# Altium PCB ISA8_Ethernet.PcbDoc (part 2 of 2)
Units mm, origin at the board's own origin, x right, y up, seen from the top; angles counter-clockwise.
Board outline 104.14 x 74.93 mm, 2 copper layers (Front, Back); 34 components, 134 nets, 366 pads, 95 vias.
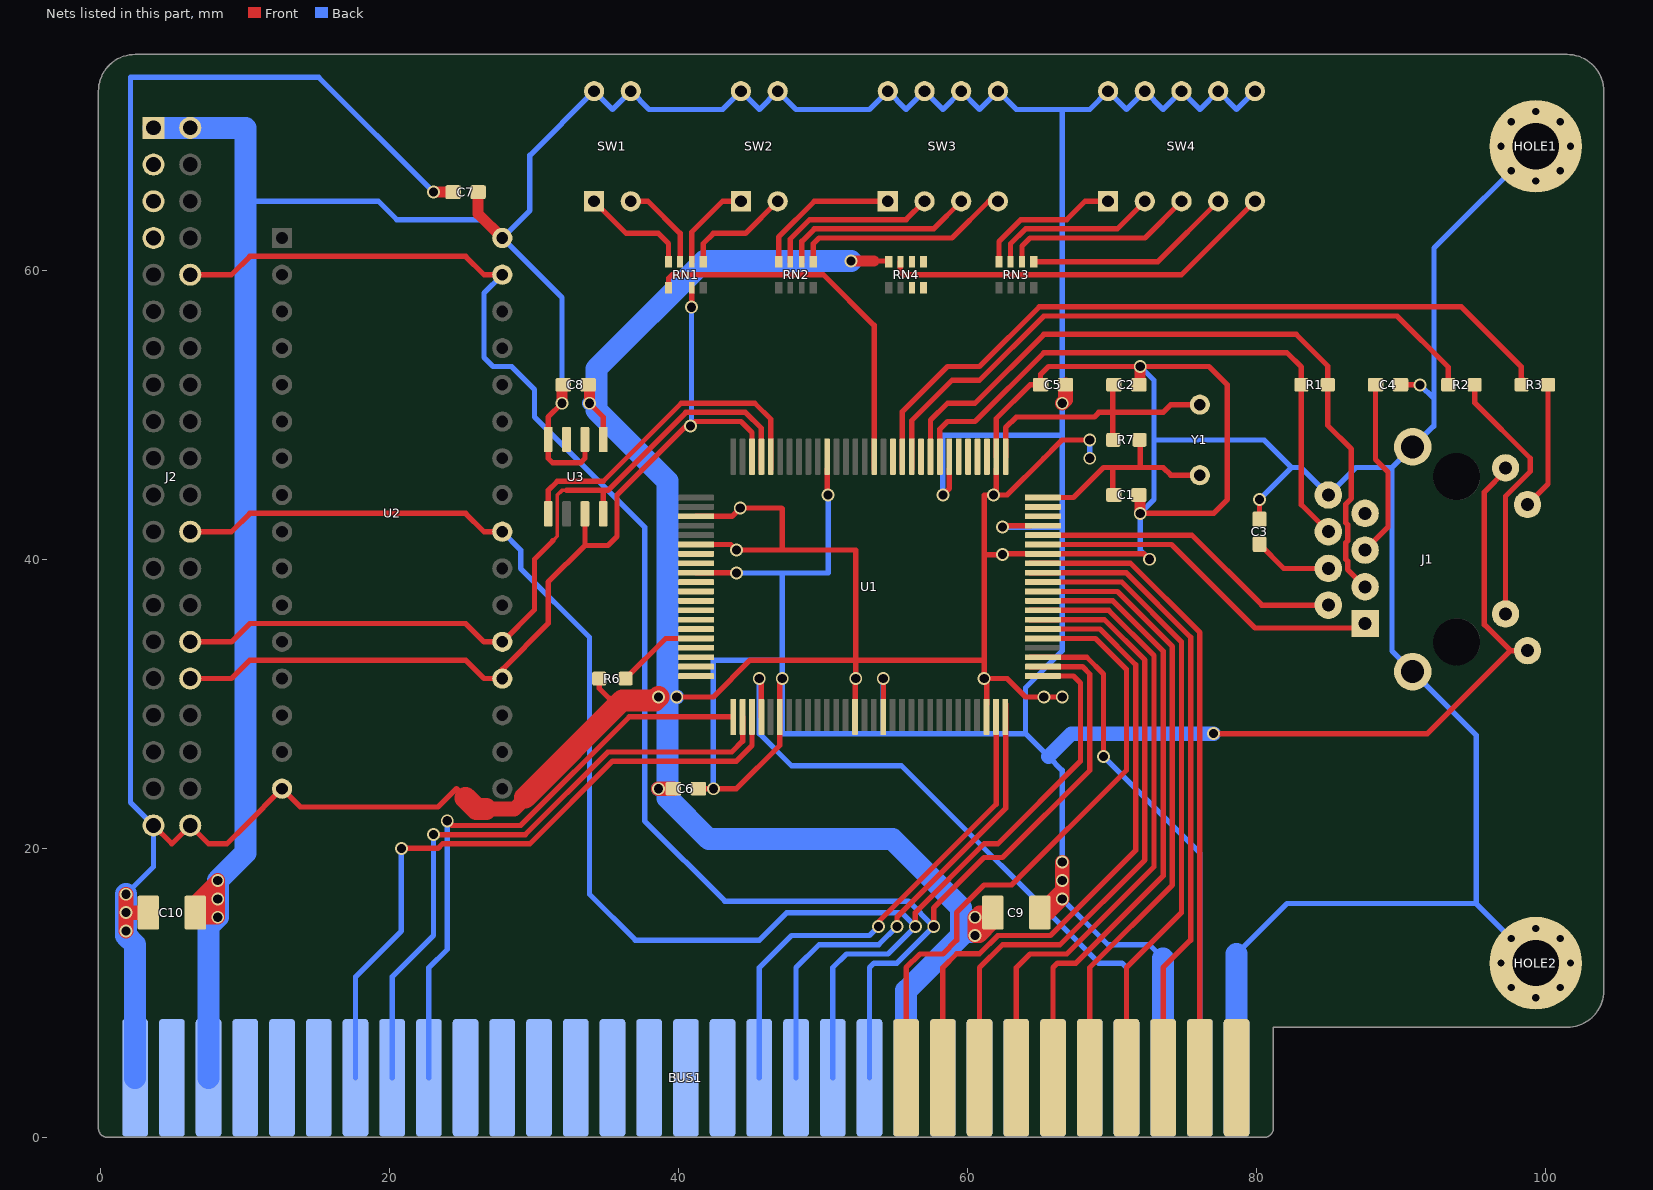
[diagram p2: the nets of this part, all layers, seen from the top]

## Via types
v1: diameter 0.889, hole 0.635, Front to Back, tented both sides, 95 vias

## Nets (pads, with @x,y where several pads share a name; then routed paths per layer and width w, separated by ;. In a path a pad name is that pad's centre, name@x,y a point inside that pad or via, vN(x,y) a via of type N, cw(c..) or ccw(c..) an arc to the next point about the centre after c; other vN are vias at no path point) (continued)
BD6: J2.32 RN1.3 U1.78 U2.20 U3.3 | length 65.7
  Front w0.368: J2.32@6.223,31.75 9.08,31.75 10.351,33.02 25.273,33.02 26.543,31.75 U2.20@27.813,31.75 27.813,32.385 30.988,35.56 30.988,38.417 33.528,40.957 ; U3.3@33.528,43.145 33.528,40.957 ; v1(40.9,57.445) 40.913,57.457 RN1.3@40.913,58.79 ; U1.78@45.088,46.225 45.088,48.765 44.323,49.53 41.148,49.53 v1(40.831,49.212) 40.519,49.212 35.75,44.444 35.75,41.593 35.115,40.957 33.528,40.957
  Back w0.368: v1(40.831,49.212) 40.9,49.282 v1(40.9,57.445)
BD7: J2.30 U1.77 U2.21 U3.4 | length 55.8
  Front w0.254: 31.313,41.283 31.623,41.593 31.623,44.45 31.941,44.767 32.258,44.767
  Front w0.368: J2.30@6.223,34.29 9.08,34.29 10.351,35.56 25.273,35.56 26.543,34.29 U2.21@27.813,34.29 30.035,36.512 30.035,40.005 31.313,41.283 ; 32.258,44.767 34.798,44.767 ; U3.4@34.798,43.145 34.798,44.767 ; U1.77@45.738,46.225 45.738,49.067 44.64,50.165 40.513,50.165 35.115,44.767 34.798,44.767
D0: BUS1.40 U1.36 | length 45.5
  Front w0.368: BUS1.40@58.293,4.127 58.293,11.747 59.254,12.708 60.833,12.708 62.095,13.97 65.732,13.97 71.628,19.866 71.628,32.703 69.156,35.175 U1.36@64.338,35.175
D1: BUS1.39 U1.37 | length 45
  Front w0.368: BUS1.39@60.833,4.127 60.833,11.747 62.42,13.335 66.389,13.335 72.263,19.209 72.263,33.02 69.458,35.825 U1.37@64.338,35.825
D2: BUS1.38 U1.38 | length 44.5
  Front w0.368: BUS1.38@63.373,4.127 63.373,11.747 64.325,12.7 66.865,12.7 72.898,18.732 72.898,33.337 69.761,36.475 U1.38@64.338,36.475
D3: BUS1.37 U1.39 | length 44.1
  Front w0.368: U1.39@64.338,37.125 70.063,37.125 73.533,33.655 73.533,18.098 67.501,12.065 66.23,12.065 65.913,11.747 BUS1.37@65.913,4.127
D4: BUS1.36 U1.40 | length 43.6
  Front w0.368: U1.40@64.338,37.775 70.366,37.775 74.168,33.972 74.168,17.462 68.453,11.747 BUS1.36@68.453,4.127
D5: BUS1.35 U1.41 | length 43.9
  Front w0.368: U1.41@64.338,38.425 70.668,38.425 74.803,34.29 74.803,15.557 70.993,11.747 BUS1.35@70.993,4.127
D6: BUS1.34 U1.42 | length 44.2
  Front w0.368: U1.42@64.338,39.075 70.971,39.075 75.438,34.608 75.438,13.652 73.533,11.747 BUS1.34@73.533,4.127
D7: BUS1.33 U1.43 | length 44.5
  Front w0.368: U1.43@64.338,39.725 71.273,39.725 76.073,34.925 BUS1.33@76.073,4.127
EECS: U1.76 U3.1 | length 23.4
  Front w0.368: U3.1@30.988,43.145 30.988,44.767 31.623,45.402 34.798,45.402 40.195,50.8 45.276,50.8 46.388,49.688 U1.76@46.388,46.225
GND: BUS1.1 BUS1.10 BUS1.31 C1.1 C2.1 C3.2 C4.2 C5.2 C6.2 C7.2 C8.2 C9.2 C10.2 HOLE1.1 HOLE2.1 J1.13 J1.R8 J2.39 J2.40 R6.1 RN4.8 U1.14 U1.28 U1.44 U1.52 U1.83 U1.86 U2.16 U3.5 | length 538.4
  Front w0.368: J2.39@3.683,21.59 4.953,20.32 J2.40@6.223,21.59 7.493,20.32 8.763,20.32 10.033,21.59 U2.16@12.573,24.13 13.843,22.86 23.368,22.86 24.638,24.13 25.908,22.86 ; v1(33.846,50.8) 34.798,49.847 U3.5@34.798,48.295 ; R6.1@34.52,31.75 34.52,31.075 35.75,29.845 ; v1(39.878,30.48) 42.418,30.48 44.958,33.02 52.261,33.02 ; U1.86@41.213,41.025 43.62,41.025 v1(44.005,40.64) 47.18,40.64 ; U1.83@41.213,42.975 43.702,42.975 v1(44.274,43.547) 47.131,43.547 47.18,43.497 47.18,40.64 ; U1.14@52.238,29.975 52.238,31.728 v1(52.261,31.75) 52.261,33.02 ; 53.53,60.642 54.501,60.642 RN4.8@54.553,60.59 ; U1.28@61.338,29.975 61.338,31.562 v1(61.151,31.75) ; U1.52@61.988,46.225 61.988,44.652 v1(61.785,44.45) ; U1.52@61.988,47.1 61.988,49.732 64.325,52.07 C5.2@65.05,52.07 65.05,52.795 65.596,53.34 v1(71.945,53.34) 76.708,53.34 77.978,52.07 77.978,44.133 77.026,43.18 v1(71.945,43.18) v1@71.856,43.18 ; U1.44@64.338,40.375 62.473,40.375 v1(62.42,40.322) 61.151,40.322 ; U1.44@65.213,40.375 72.211,40.375 v1(72.581,40.005) ; v1(66.548,30.48) v1(65.278,30.48) 64.008,30.48 62.738,31.75 v1(61.151,31.75) ; v1(68.453,48.26) 66.548,48.26 66.23,47.942 65.278,46.99 62.738,44.45 v1(61.785,44.45) ; C3.2@80.2,42.773 v1(80.2,44.133) ; C4.2@89.953,52.07 v1(91.313,52.07) ; 47.18,40.64 52.261,40.64 52.261,33.02 ; 52.261,33.02 61.151,33.02 ; v1(61.151,31.75) 61.151,33.02 ; 61.151,33.02 61.151,40.322 ; 61.151,40.322 61.151,44.45 v1(61.785,44.45)
  Front w0.762: v1(23.05,65.405) C7.2@24.41,65.405 ; 25.908,22.86 27.189,22.86 27.199,22.85 28.756,22.85 29.4,23.495 ; C8.2@33.756,52.07 33.846,51.98 v1(33.846,50.8) ; v1(51.943,60.642) 53.53,60.642 ; C1.1@71.856,44.45 71.945,44.36 v1(71.945,43.18) ; C2.1@71.856,52.07 71.945,52.16 v1(71.945,53.34)
  Front w1.016: v1(1.778,14.287) v1(1.778,15.557) ; v1(1.778,16.827) v1(1.778,15.557) ; C10.2@3.328,15.557 v1(1.778,15.557) ; 25.273,23.495 26.045,22.723 28.629,22.723 29.4,23.495 35.75,29.845 36.386,30.48 v1(38.608,30.48) ; v1(38.608,24.13) C6.2@39.65,24.13 ; v1(60.515,13.97) 60.833,13.97 61.748,14.885 C9.2@61.748,15.557 60.833,15.557 v1(60.515,15.24) v1(60.515,13.97)
  Front w1.524: 25.273,23.495 26.032,22.736 26.68,22.736 ; 29.384,23.512 36.118,30.246 38.374,30.246 v1(38.608,30.48)
  Back w0.368: v1(1.778,16.827) 3.683,18.732 J2.39@3.683,21.59 2.095,23.177 2.095,73.343 15.113,73.343 v1(23.05,65.405) ; v1(68.453,46.99) v1(68.453,48.26) ; v1(71.945,53.34) 72.898,52.388 72.898,48.26 ; v1(72.581,40.005) 71.945,40.64 v1(71.945,43.18) 72.898,44.133 72.898,48.26 ; 78.613,12.7 82.105,16.192 95.186,16.192 ; v1(80.2,44.133) 82.423,46.355 ; v1(91.313,52.07) 92.266,51.117 ; HOLE2.1@99.314,12.065 95.186,16.192 ; HOLE1.1@99.314,68.58 92.266,61.531 92.266,51.117 ; 72.898,48.26 80.518,48.26 82.423,46.355 ; 82.423,46.355 83.058,46.355 J1.R8@84.963,44.45 86.868,46.355 89.368,46.355 ; 89.368,46.355 89.368,33.655 J1.13@90.793,32.23 95.186,27.837 95.186,16.192 ; 89.368,46.355 J1.13@90.793,47.78 92.226,49.212 92.266,49.212 92.266,51.117
  Back w0.762: v1(33.846,50.8) 34.322,50.324
  Back w1.016: v1(33.846,50.8) 34.163,50.8 34.322,50.959 ; v1(38.608,24.13) 38.925,24.13 39.243,24.447 ; v1(38.608,30.48) 39.243,30.48 v1(39.878,30.48) ; 59.563,13.97 v1(60.515,13.97) ; 59.563,15.875 60.198,15.24 v1(60.515,15.24)
  Back w1.524: v1(1.778,16.827) v1(1.778,15.557) v1(1.778,14.287) 1.778,13.97 2.413,13.335 BUS1.31@2.413,4.127 ; v1(51.943,60.642) 41.783,60.642 34.322,53.181 34.322,50.959 34.322,50.324 39.243,45.402 39.243,30.48 39.243,24.447 39.243,23.495 42.1,20.637 54.8,20.637 59.563,15.875 59.563,13.97 55.753,10.16 BUS1.10@55.753,4.127 ; BUS1.1@78.613,4.127 78.613,12.7
I\O\C\S\1\6\: R6.2 U1.96 | length 6
  Front w0.368: R6.2@36.346,31.75 39.121,34.525 U1.96@41.213,34.525
I\O\R\: BUS1.14 U1.29 | length 35.8
  Front w0.368: v1(53.848,14.605) 53.848,14.922 61.988,23.062 U1.29@61.988,29.975
  Back w0.368: BUS1.14@45.593,4.127 45.593,11.747 47.816,13.97 53.213,13.97 v1(53.848,14.605)
I\O\W\: BUS1.13 U1.30 | length 34.3
  Front w0.368: v1(55.118,14.605) 55.118,15.24 62.638,22.76 U1.30@62.638,29.975
  Back w0.368: BUS1.13@48.133,4.127 48.133,11.747 49.721,13.335 53.848,13.335 v1(55.118,14.605)
IOCHRDY: BUS1.41 U1.35 | length 44.2
  Front w0.368: BUS1.41@55.753,4.127 55.753,11.747 56.706,12.7 58.293,12.7 59.245,13.652 59.245,15.557 61.151,17.462 63.049,17.462 70.993,25.407 70.993,32.385 68.853,34.525 U1.35@64.338,34.525
IRQ3: BUS1.25 U1.3 | length 46.4
  Front w0.368: v1(20.828,20.002) 23.368,20.002 23.685,20.32 29.718,20.32 35.433,26.035 44.005,26.035 45.088,27.117 U1.3@45.088,29.1
  Back w0.368: BUS1.25@17.653,4.127 17.653,11.112 20.828,14.287 v1(20.828,20.002)
IRQ4: BUS1.24 U1.2 | length 43.8
  Front w0.368: v1(23.05,20.955) 29.4,20.955 35.115,26.67 43.688,26.67 44.438,27.42 U1.2@44.438,29.1
  Back w0.368: BUS1.24@20.193,4.127 20.193,11.112 23.05,13.97 v1(23.05,20.955)
IRQ5: BUS1.23 U1.1 | length 41.3
  Front w0.368: v1(24.003,21.907) 24.321,21.59 29.083,21.59 36.593,29.1 U1.1@43.788,29.1
  Back w0.368: BUS1.23@22.733,4.127 22.733,11.747 24.003,13.018 v1(24.003,21.907)
IRQ9: BUS1.4 U1.4 | length 46.2
  Front w0.368: v1(45.593,31.75) 45.738,31.605 U1.4@45.738,29.1
  Back w0.368: v1(45.593,31.75) 45.593,27.94 47.816,25.717 55.435,25.717 69.088,12.065 70.675,12.065 70.993,11.747 BUS1.4@70.993,4.127
JP: RN1.1 U1.65 | length 26.4
  Front w0.368: RN1.1@39.313,58.79 39.313,59.442 39.56,59.69 50.038,59.69 53.538,56.19 53.538,55.237 U1.65@53.538,46.225
LED_CRS: R3.2 U1.62 | length 52.8
  Front w0.368: U1.62@55.488,46.225 55.488,50.217 58.61,53.34 60.833,53.34 64.96,57.468 94.17,57.468 98.298,53.34 98.298,52.585 98.338,52.545 R3.2@98.338,52.07
LED_LINK: R2.2 U1.61 | length 46.2
  Front w0.368: U1.61@56.138,46.225 56.138,49.598 58.928,52.387 60.833,52.387 65.278,56.832 89.725,56.832 93.258,53.3 R2.2@93.258,52.07
Net-(BUS1-Pad5): BUS1.5
Net-(BUS1-Pad6): BUS1.6
Net-(BUS1-Pad7): BUS1.7
Net-(BUS1-Pad8): BUS1.8
Net-(BUS1-Pad9): BUS1.9
Net-(BUS1-Pad15): BUS1.15
Net-(BUS1-Pad16): BUS1.16
Net-(BUS1-Pad17): BUS1.17
Net-(BUS1-Pad18): BUS1.18
Net-(BUS1-Pad19): BUS1.19
Net-(BUS1-Pad20): BUS1.20
Net-(BUS1-Pad21): BUS1.21
Net-(BUS1-Pad22): BUS1.22
Net-(BUS1-Pad26): BUS1.26
Net-(BUS1-Pad27): BUS1.27
Net-(BUS1-Pad28): BUS1.28
Net-(BUS1-Pad30): BUS1.30
Net-(BUS1-Pad32): BUS1.32
Net-(C1-Pad2): C1.2 R7.1 U1.50 Y1.1 | length 15.8
  Front w0.368: U1.50@65.213,44.275 67.325,44.275 69.406,46.355 70.04,46.355 ; C1.2@70.13,44.45 70.04,44.54 70.04,46.355 ; R7.1@71.906,48.26 71.945,48.22 71.945,46.355 ; Y1.1@76.073,45.819 74.069,45.819 73.533,46.355 71.945,46.355 ; 70.04,46.355 71.945,46.355
Net-(C2-Pad2): C2.2 R7.2 U1.51 Y1.2 | length 20
  Front w0.368: U1.51@62.638,47.1 62.638,49.113 63.373,49.847 68.77,49.847 69.088,50.165 70.04,50.165 ; R7.2@70.08,48.26 70.04,48.3 70.04,50.165 ; C2.2@70.13,52.07 70.04,51.98 70.04,50.165 ; R7.2@70.358,48.3 R7.2@70.398,48.26 ; Y1.2@76.073,50.701 74.069,50.701 73.533,50.165 70.04,50.165
Net-(C3-Pad1): C3.1 J1.R4 | length 5.5
  Front w0.368: C3.1@80.2,41.047 81.878,39.37 J1.R4@84.963,39.37
Net-(C4-Pad1): C4.1 J1.R5 | length 12.4
  Front w0.368: J1.R5@87.503,40.64 89.09,42.227 89.09,46.038 88.228,46.9 C4.1@88.228,52.07
Net-(J1-PadL2): J1.L2 R3.1 | length 8.9
  Front w0.368: J1.L2@98.743,43.79 100.163,45.21 R3.1@100.163,52.07
Net-(J1-PadL3): J1.L3 R2.1 | length 18.2
  Front w0.368: R2.1@95.083,52.07 95.083,50.84 98.933,46.99 98.933,46.073 97.223,44.363 J1.L3@97.223,36.22
Net-(J1-PadR7): J1.R7
Net-(J2-Pad3): J2.3
Net-(J2-Pad5): J2.5
Net-(J2-Pad7): J2.7
Net-(RN1-Pad5): RN1.5 SW2.2 | length 7.6
  Front w0.368: RN1.5@41.713,60.59 41.713,61.843 42.418,62.547 44.64,62.547 SW2.2@46.863,64.77
Net-(RN1-Pad6): RN1.6 SW2.1 | length 6.3
  Front w0.368: RN1.6@40.913,60.59 40.913,62.63 43.053,64.77 SW2.1@44.323,64.77
Net-(RN1-Pad7): RN1.7 SW1.2 | length 6.3
  Front w0.368: SW1.2@36.703,64.77 37.891,64.77 40.113,62.547 RN1.7@40.113,60.59
Net-(RN1-Pad8): RN1.8 SW1.1 | length 7.6
  Front w0.368: SW1.1@34.163,64.77 36.386,62.547 38.608,62.547 39.313,61.843 RN1.8@39.313,60.59
Net-(RN2-Pad5): RN2.5 SW3.4 | length 15.2
  Front w0.368: RN2.5@49.333,60.59 49.333,61.843 49.721,62.23 58.928,62.23 61.468,64.77 SW3.4@62.103,64.77
Net-(RN2-Pad6): RN2.6 SW3.3 | length 13.6
  Front w0.368: RN2.6@48.533,60.59 48.533,61.995 49.403,62.865 57.658,62.865 SW3.3@59.563,64.77
Net-(RN2-Pad7): RN2.7 SW3.2 | length 11.9
  Front w0.368: RN2.7@47.733,60.59 47.733,62.148 49.085,63.5 55.753,63.5 SW3.2@57.023,64.77
Net-(RN2-Pad8): RN2.8 SW3.1 | length 10.3
  Front w0.368: RN2.8@46.933,60.59 46.933,62.3 49.403,64.77 SW3.1@54.483,64.77
Net-(RN3-Pad5): RN3.5 SW4.4 | length 14.5
  Front w0.368: RN3.5@64.573,60.59 73.163,60.59 SW4.4@77.343,64.77
Net-(RN3-Pad6): RN3.6 SW4.3 | length 13.4
  Front w0.368: RN3.6@63.773,60.59 63.773,61.677 64.325,62.23 64.643,62.23 72.263,62.23 SW4.3@74.803,64.77
Net-(RN3-Pad7): RN3.7 SW4.2 | length 11.7
  Front w0.368: RN3.7@62.973,60.59 62.973,61.83 64.008,62.865 70.358,62.865 SW4.2@72.263,64.77
Net-(RN3-Pad8): RN3.8 SW4.1 | length 10.1
  Front w0.368: RN3.8@62.173,60.59 62.173,61.982 63.691,63.5 66.865,63.5 68.135,64.77 SW4.1@69.723,64.77
Net-(RN4-Pad3): RN4.3
Net-(RN4-Pad4): RN4.4
Net-(RN4-Pad5): RN4.5
Net-(RN4-Pad6): RN4.6
Net-(RN4-Pad7): RN4.7 SW4.5 | length 27.4
  Front w0.368: RN4.7@55.353,60.59 55.353,59.899 55.562,59.69 74.803,59.69 SW4.5@79.883,64.77
Net-(U1-Pad48): U1.48
Net-(U1-Pad49): U1.49
Net-(U1-Pad53): U1.53
Net-(U1-Pad54): U1.54
Net-(U1-Pad55): U1.55
Net-(U1-Pad56): U1.56
Net-(U1-Pad60): U1.60
Net-(U1-Pad63): U1.63
Net-(U1-Pad87): U1.87
Net-(U1-Pad88): U1.88
Net-(U1-Pad90): U1.90
Net-(U1-Pad91): U1.91
Net-(U1-Pad92): U1.92
Net-(U1-Pad93): U1.93
Net-(U1-Pad94): U1.94
Net-(U1-Pad95): U1.95
Net-(U1-Pad97): U1.97
Net-(U1-Pad98): U1.98
Net-(U1-Pad99): U1.99
Net-(U1-Pad100): U1.100
Net-(U3-Pad7): U3.7
RSTDRV: BUS1.2 U1.33 | length 36.2
  Front w0.368: U1.33@64.338,33.225 68.248,33.225 69.406,32.067 v1(69.406,26.352)
  Back w0.368: v1(69.406,26.352) 76.073,19.685 BUS1.2@76.073,4.127
S\M\E\M\R\: BUS1.12 J2.24 U1.31 U2.24 | length 114.7
  Front w0.368: J2.24@6.223,41.91 9.08,41.91 10.351,43.18 25.273,43.18 26.543,41.91 U2.24@27.813,41.91 ; v1(56.388,14.605) 56.388,15.557 61.151,20.32 62.103,20.32 67.818,26.035 67.818,31.432 67.325,31.925 U1.31@65.213,31.925
  Back w0.368: U2.24@27.813,41.91 29.083,40.64 29.083,39.37 33.846,34.608 33.846,16.828 37.02,13.652 45.593,13.652 47.498,15.557 55.435,15.557 v1(56.388,14.605) 54.483,12.7 51.625,12.7 50.673,11.747 BUS1.12@50.673,4.127
S\M\E\M\W\: BUS1.11 J2.10 U1.32 U2.31 | length 129.6
  Front w0.368: J2.10@6.223,59.69 9.08,59.69 10.351,60.96 25.273,60.96 26.543,59.69 U2.31@27.813,59.69 ; v1(57.658,14.605) 57.658,15.875 61.151,19.367 62.42,19.367 68.453,25.4 68.453,32.067 67.946,32.575 U1.32@64.338,32.575
  Back w0.368: U2.31@27.813,59.69 26.543,58.42 26.543,53.975 27.178,53.34 28.455,53.34 28.455,53.333 30.035,51.752 30.035,49.847 37.659,42.224 37.659,21.904 43.212,16.351 55.912,16.351 v1(57.658,14.605) 55.118,12.065 53.53,12.065 53.213,11.747 BUS1.11@53.213,4.127
TP_RX+: J1.R3 R1.1 U1.59 | length 51
  Front w0.368: U1.59@57.438,46.225 57.438,49.628 58.61,50.8 60.515,50.8 65.278,55.562 82.74,55.562 84.923,53.38 R1.1@84.923,52.07 84.923,49.252 86.55,47.625 86.55,44.202 86.169,43.82 86.169,42.54 86.297,42.411 86.297,41.27 86.169,41.141 86.169,40 86.297,39.871 86.297,39.306 J1.R3@87.503,38.1
TP_RX-: J1.R6 R1.2 U1.58 | length 42.6
  Front w0.368: U1.58@58.088,46.225 58.088,49.007 58.61,49.53 60.515,49.53 65.278,54.292 82.105,54.292 83.098,53.3 R1.2@83.098,52.07 83.098,43.775 J1.R6@84.963,41.91
TP_TX+: J1.R1 U1.45 | length 24.8
  Front w0.368: U1.45@65.213,41.025 74.1,41.025 79.883,35.242 87.185,35.242 J1.R1@87.503,35.56
TP_TX-: J1.R2 U1.46 | length 21.8
  Front w0.368: U1.46@65.213,41.675 75.514,41.675 80.359,36.83 J1.R2@84.963,36.83
VCC: BUS1.3 BUS1.29 C5.1 C6.1 C7.1 C8.1 C9.1 C10.1 J1.L1 J1.L4 J2.1 J2.2 SW1.3 SW1.4 SW2.3 SW2.4 SW3.5 SW3.6 SW3.7 SW3.8 SW4.6 SW4.7 SW4.8 SW4.9 SW4.10 U1.6 U1.17 U1.47 U1.57 U1.70 U1.89 U2.32 U3.6 U3.8 | length 426
  Front w0.368: v1(31.941,50.8) 30.988,49.847 U3.8@30.988,48.295 30.988,46.99 31.305,46.672 33.21,46.672 33.528,46.99 U3.6@33.528,48.295 ; U1.89@41.213,39.075 43.983,39.075 v1(44.005,39.052) ; C6.1@41.376,24.13 v1(42.418,24.13) 44.005,24.13 47.013,27.137 U1.6@47.013,29.1 47.013,31.582 v1(47.18,31.75) ; U1.70@50.288,46.225 50.288,44.518 v1(50.355,44.45) ; v1(54.165,31.75) 54.188,31.728 U1.17@54.188,29.975 ; v1(58.293,44.45) 58.738,44.895 U1.57@58.738,46.225 ; v1(62.42,42.227) 62.518,42.325 U1.47@64.338,42.325 ; v1(77.025,27.94) 91.818,27.94 97.558,33.68 ; J1.L1@97.223,46.33 97.223,46.126 95.758,44.661 95.758,35.48 97.558,33.68 ; J1.L4@98.743,33.68 97.558,33.68
  Front w0.762: C7.1@26.136,65.405 26.136,63.907 U2.32@27.813,62.23 ; v1(31.941,50.8) 31.941,51.98 C8.1@32.03,52.07
  Front w1.016: v1(66.548,19.05) v1(66.548,17.78) 66.548,17.145 ; v1(66.548,50.8) 66.776,51.028 C5.1@66.776,52.07 ; C10.1@6.578,15.557 6.578,16.23 v1(8.128,17.78) v1(8.128,16.51) ; C10.1@6.578,15.557 7.175,15.557 v1(8.128,16.51) ; C10.1@6.578,15.557 6.896,15.24 v1(8.128,15.24) v1(8.128,16.51) ; 66.548,17.145 v1(66.548,16.51) 65.596,15.557 C9.1@64.998,15.557 66.548,17.107 66.548,17.145
  Back w0.368: 10.033,64.77 19.241,64.77 20.511,63.5 26.543,63.5 U2.32@27.813,62.23 ; v1(31.941,50.8) 31.941,58.102 U2.32@27.813,62.23 ; v1(42.418,24.13) 42.418,33.02 47.18,33.02 ; v1(44.005,39.052) 47.18,39.052 ; v1(50.355,44.45) 50.355,39.052 47.18,39.052 ; v1(54.165,31.75) 54.165,27.94 ; v1(58.293,44.45) 58.293,48.578 66.548,48.578 v1(66.548,50.8) ; v1(62.42,42.227) 66.548,42.227 ; v1(66.548,16.51) 69.723,13.335 72.581,13.335 73.533,12.383 ; v1(66.548,19.05) 66.548,25.4 65.596,26.352 64.008,27.94 ; SW4.6@79.883,72.39 78.613,71.12 SW4.7@77.343,72.39 76.073,71.12 SW4.8@74.803,72.39 73.533,71.12 SW4.9@72.263,72.39 70.993,71.12 SW4.10@69.723,72.39 68.453,71.12 66.548,71.12 ; U2.32@27.813,62.23 29.718,64.135 29.718,67.945 SW1.4@34.163,72.39 35.433,71.12 SW1.3@36.703,72.39 37.973,71.12 43.053,71.12 SW2.4@44.323,72.39 45.593,71.12 SW2.3@46.863,72.39 48.133,71.12 53.213,71.12 SW3.8@54.483,72.39 55.753,71.12 SW3.7@57.023,72.39 58.293,71.12 SW3.6@59.563,72.39 60.833,71.12 SW3.5@62.103,72.39 63.373,71.12 66.548,71.12 ; 47.18,33.02 47.18,39.052 ; 47.18,33.02 v1(47.18,31.75) 47.18,27.94 54.165,27.94 ; 54.165,27.94 64.008,27.94 ; 64.008,27.94 64.008,31.115 66.548,33.655 66.548,42.227 ; 66.548,42.227 v1(66.548,50.8) ; v1(66.548,50.8) 66.548,71.12
  Back w1.016: U2.32@27.813,62.23 U2.32@27.931,62.23 ; 65.596,26.352 67.183,27.94 v1(77.025,27.94)
  Back w1.524: J2.1@3.683,69.85 J2.2@6.223,69.85 10.033,69.85 10.033,64.77 10.033,19.685 8.572,18.224 v1(8.128,17.78) v1(8.128,16.51) v1(8.128,15.24) 7.493,14.605 BUS1.29@7.493,4.127 ; BUS1.3@73.533,4.127 73.533,12.383
pads on no net: J1.Un1 J1.Un2

## Polygon pours and split planes (outlines as drawn)
VCC on Back "Back-VCC" (solid, remove dead copper, pour order 3): 80.518,72.707 80.518,56.197 80.2,55.88 67.501,55.88 67.183,55.562 67.183,33.972 64.325,31.115 64.325,29.845 75.438,18.732 75.438,12.065 74.168,10.795 72.898,10.795 70.993,12.7 69.406,12.7 55.753,26.352 48.133,26.352 46.228,28.258 45.276,28.258 45.276,25.4 43.053,23.177 41.783,23.177 40.831,24.13 40.831,39.37 41.148,39.688 45.276,39.688 47.498,41.91 47.498,48.578 49.721,50.8 56.07,50.8 57.975,52.705 57.975,62.23 57.658,62.547 41.465,62.547 32.893,53.975 32.893,50.165 32.575,49.847 31.305,49.847 30.988,50.165 30.988,58.737 29.083,60.642 16.7,60.642 14.16,63.182 10.986,63.182 10.668,62.865 9.398,62.865 9.398,70.485 16.066,70.485 22.415,64.135 24.956,64.135 33.846,73.025 80.2,73.025
GND on Back "Back-GND-1" (solid, remove dead copper, pour order 2): 57.34,61.595 57.34,58.737 57.023,58.42 40.513,58.42 39.878,57.785 39.878,46.99 41.783,45.085 42.735,45.085 44.323,43.497 44.323,42.227 45.276,41.275 45.276,40.64 44.958,40.322 40.513,40.322 40.195,40.005 40.195,23.812 41.465,22.543 43.37,22.543 45.91,25.082 55.118,25.082 67.501,12.7 67.501,12.383 67.183,12.065 56.706,12.065 58.928,14.287 58.928,14.922 56.706,17.145 43.37,17.145 38.291,22.225 38.291,42.545 33.528,47.307 33.528,53.34 42.1,61.912 57.023,61.912
GND on Back "Back-GND" (solid, remove dead copper, pour order 0): 104.013,48.895 91.948,48.895 89.408,46.355 89.408,33.655 91.948,31.115 104.013,31.115 104.013,7.62 81.153,7.62 81.153,11.747 80.835,12.065 80.518,12.065 79.248,10.795 77.978,10.795 76.708,12.065 76.708,20.002 70.675,26.035 70.675,26.67 70.993,26.987 77.66,26.987 77.978,27.305 77.978,28.575 77.66,28.892 66.23,28.892 64.96,30.162 64.96,30.797 65.596,31.432 67.818,33.337 67.818,54.927 68.135,55.245 80.835,55.245 81.153,55.562 81.153,73.343 80.835,73.66 33.528,73.66 24.638,64.77 22.733,64.77 16.383,71.12 2.73,71.12 2.413,70.802 2.413,68.897 2.73,68.58 8.445,68.58 8.763,68.263 8.763,22.225 6.223,19.685 6.223,12.7 4.318,10.795 1.778,10.795 -0.127,12.7 -0.127,74.93 104.013,74.93
GND on Front "Front-GND-1" (solid, remove dead copper, pour order 4): 26.226,23.812 26.86,23.812 27.495,23.177 28.13,23.177 28.765,23.812 30.67,23.812 28.765,21.907 25.273,21.907 24.638,22.543 22.098,22.543 19.241,19.685 13.525,19.685 12.573,18.732 5.271,18.732 3.683,17.145 3.683,13.335 3.365,13.018 0.826,13.018 -0.127,13.97 -0.127,21.907 0.826,22.86 8.763,22.86 10.668,24.765 25.273,24.765
GND on Front "Front-GND" (solid, remove dead copper, pour order 1): 82.423,52.705 82.423,34.608 83.058,33.972 89.725,33.972 92.583,31.115 92.583,29.845 92.266,29.527 64.008,29.527 62.738,30.797 43.688,30.797 42.418,29.527 36.068,29.527 33.528,26.987 33.528,31.75 34.163,32.385 35.115,32.385 35.433,32.067 35.433,31.115 35.75,30.797 37.973,30.797 38.608,31.432 42.735,31.432 43.053,31.75 43.053,41.275 46.863,41.275 46.863,43.18 43.688,43.18 43.688,43.815 45.276,45.402 63.055,45.402 63.373,45.72 63.373,48.578 63.055,48.895 61.468,48.895 60.833,49.53 65.278,53.975 81.153,53.975

## Keep-outs
Edge.Cuts:
  lines w0.381: -0.127,0.635 ccw(c0.508,0.635) 0.508,0 ; -0.127,0.635 ccw(c0.508,0.635) 0.508,0 ; -0.127,0.635 -0.127,72.39 ; -0.127,0.635 -0.127,72.39 ; -0.127,72.39 cw(c2.413,72.39) 2.413,74.93 ; -0.127,72.39 cw(c2.413,72.39) 2.413,74.93 ; 0.508,0 80.518,0 ; 0.508,0 80.518,0 ; 2.413,74.93 101.473,74.93 ; 2.413,74.93 101.473,74.93 ; 80.518,0 ccw(c80.518,0.635) 81.153,0.635 ; 80.518,0 ccw(c80.518,0.635) 81.153,0.635 ; 81.153,0.635 81.153,7.62 ; 81.153,0.635 81.153,7.62 ; 81.153,7.62 101.473,7.62 ; 81.153,7.62 101.473,7.62 ; 101.473,7.62 ccw(c101.473,10.16) 104.013,10.16 ; 101.473,7.62 ccw(c101.473,10.16) 104.013,10.16 ; 101.473,74.93 cw(c101.473,72.39) 104.013,72.39 ; 101.473,74.93 cw(c101.473,72.39) 104.013,72.39 ; 104.013,10.16 104.013,72.39 ; 104.013,10.16 104.013,72.39

## Silkscreen, mask and mechanical layers (free items; w line width, h text height)
F.SilkS:
  lines w0.12: 0.826,68.897 1.778,69.85 0.826,70.802 0.826,68.897 ; 75.436,15.724 75.455,15.836 75.529,16.003 75.584,16.115 75.584,16.338 75.603,16.357 75.751,16.412 75.714,16.505 75.695,16.599 75.732,16.691 75.788,16.785 75.788,16.915 75.769,17.026 75.806,17.138 75.843,17.212 75.862,17.436 75.881,17.64 75.918,17.826 75.955,17.845 75.918,17.919 75.936,17.994 75.918,18.106 75.936,18.199 75.973,18.422 75.992,18.571 76.01,18.943 76.103,18.887 76.103,18.962 76.066,19.092 76.084,19.092 76.029,19.185 76.029,19.259 76.01,19.501 76.066,19.557 76.047,19.761 76.214,19.724 76.288,19.706 76.38,19.761 76.454,19.743 76.584,19.706 76.658,19.724 76.825,19.631 76.899,19.538 76.954,19.352 76.954,19.241 76.973,19.11 77.047,19.036 77.214,18.999 77.417,18.999 77.584,19.017 77.658,19.073 77.732,19.147 77.954,19.129 78.102,19.11 78.195,18.999 78.232,19.073 78.417,19.073 78.676,19.241 78.788,19.129 78.936,19.147 79.028,19.241 79.044,19.246 79.084,19.259 79.138,19.272 79.181,19.278 79.195,19.278 79.207,19.278 79.244,19.281 79.278,19.287 79.299,19.293 79.306,19.296 79.473,19.371 79.621,19.408 79.787,19.389 79.917,19.52 80.361,19.52 81.269,19.538 81.269,19.557 81.51,19.575 81.528,19.501 81.639,19.371 81.695,19.296 81.843,19.166 81.843,19.036 81.834,19.021 81.81,18.973 81.78,18.887 81.756,18.79 81.75,18.757 81.744,18.725 81.724,18.63 81.697,18.541 81.659,18.461 81.617,18.39 81.602,18.366 81.595,18.355 81.576,18.319 81.566,18.289 81.567,18.271 81.577,18.264 81.59,18.263 81.605,18.267 81.616,18.271 81.621,18.273 81.491,17.994 81.38,17.733 81.361,17.603 81.435,17.454 81.547,17.436 81.621,17.361 81.602,17.25 81.565,17.119 81.584,17.008 81.51,16.915 81.602,14.794 80.935,14.757 80.121,14.738 78.473,14.719 77.566,14.738 76.936,14.757 76.473,14.775 76.121,14.775 75.732,14.794 75.714,14.812 75.621,14.85 75.566,14.961 75.51,15.129 75.51,15.222 75.529,15.333 75.566,15.482 75.529,15.594 75.436,15.724
  lines w0.15: 88.138,12.7 89.408,11.43 ; 90.043,12.065 91.313,10.795 ; 88.138,12.065 89.408,10.795 ; 88.138,12.065 86.868,10.795 85.598,10.795 88.138,13.335 ; 88.138,12.065 88.138,13.335 ; 88.138,13.335 89.408,12.065 ; 89.408,10.795 90.043,11.43 ; 89.408,10.795 89.408,12.065 ; 89.408,12.065 90.043,12.7 ; 90.043,11.43 90.678,10.795 91.948,10.795 90.043,12.7 ; 90.043,11.43 90.043,12.7
  text "PnP" at 37.353,60.858 h1 r90
  text "Switches" at 34.837,57.544 h1 r90
  text "ISA 8-bit Ethernet Controller / Version 1.0 / Copyright (C) 2021 Sergey Kiselev" at 72.361,55.817 h1.2
  text "JLCJLCJLCJLC" at 48.257,37.389 h1.02
  text "Design files and documentation: / github.com/skiselev/isa8_eth" at 77.978,24.542 h1
  text "Licensed under CERN-OHL-S: / https://cern-ohl.web.cern.ch" at 77.978,20.605 h1
  text "Designed / in / Oregon" at 76.318,14.882 h0.8
  text "www.malinov.com" at 81.773,8.747 h1.2
B.SilkS:
  lines w0.15: 12.255,64.453 26.543,64.453 ; 32.258,40.64 77.025,40.64 ; 35.115,61.277 64.643,61.277 ; 69.723,61.277 99.251,61.277
  text "5V" at 2.581,69.2 h1
  text "5V" at 9.128,69.2 h1
  text "SW1.1: OFF - Jumperless; ON - Switches / SW1.2: OFF - No PnP; ON - PnP Mode" at 64.96,66.865 h1
  text "NC" at 2.581,66.66 h1
  text "A21" at 9.599,66.66 h1
  text "NC" at 2.581,64.12 h1
  text "A20" at 10.027,64.12 h1
  text "NC" at 2.581,61.58 h1
  text "A19" at 9.823,61.58 h1
  text "A19" at 2.581,59.04 h1
  text "~MEMW" at 12.041,59.04 h1
  text "SW2.2 /  / OFF / OFF / ON / ON" at 16.7,57.363 h1
  text "SW2.1 /  / OFF / ON / OFF / ON" at 21.78,57.363 h1
  text "IRQ /  / IRQ2 / IRQ3 / IRQ4 / IRQ5" at 26.86,57.125 h1
  text "A16" at 2.581,56.5 h1
  text "A17" at 9.87,56.5 h1
  text "A15" at 2.581,53.96 h1
  text "A14" at 9.918,53.96 h1
  text "A12" at 2.581,51.42 h1
  text "A13" at 9.87,51.42 h1
  text "A7" at 2.581,48.88 h1
  text "A8" at 9.137,48.88 h1
  text "SW3.4 /  / OFF / OFF / OFF / OFF / ON / ON / ON / ON" at 39.56,47.894 h1
  text "SW3.3 /  / OFF / OFF / OFF / OFF / OFF / OFF / OFF / OFF" at 44.64,47.894 h1
  text "SW3.2 /  / OFF / OFF / ON / ON / OFF / OFF / ON / ON" at 49.721,47.894 h1
  text "SW3.1 /  / OFF / ON / OFF / ON / OFF / ON / OFF / ON" at 54.8,47.894 h1
  text "SW3.4 /  / OFF / OFF / OFF / OFF / ON / ON / ON / ON" at 74.168,47.894 h1
  text "SW3.3 /  / ON / ON / ON / ON / ON / ON / ON / ON" at 79.248,47.894 h1
  text "SW3.2 /  / OFF / OFF / ON / ON / OFF / OFF / ON / ON" at 84.328,47.894 h1
  text "SW3.1 /  / OFF / ON / OFF / ON / OFF / ON / OFF / ON" at 89.408,47.894 h1
  text "I/O Address /  / 0x300 / 0x320 / 0x340 / 0x360 / 0x380 / 0x3A0 / 0x3C0 / 0x3E0" at 64.96,47.822 h1
  text "I/O Address /  / 0x200 / 0x220 / 0x240 / 0x260 / 0x280 / 0x2A0 / 0x2C0 / 0x2E0" at 99.568,47.822 h1
  text "A6" at 2.581,46.34 h1
  text "A9" at 9.089,46.34 h1
  text "A5" at 2.581,43.8 h1
  text "A11" at 9.442,43.8 h1
  text "A4" at 2.581,41.26 h1
  text "~MEMR" at 11.756,41.26 h1
  text "A3" at 2.581,38.72 h1
  text "A10" at 9.87,38.72 h1
  text "OFF: 16 KiB ROM / ON:  Page Mode" at 42.133,38.1 h1 r90
  text "A2" at 2.581,36.18 h1
  text "~CS" at 9.87,36.18 h1
  text "A1" at 2.581,33.64 h1
  text "D7" at 9.032,33.64 h1
  text "A0" at 2.581,31.1 h1
  text "D6" at 8.985,31.1 h1
  text "D0" at 2.581,28.56 h1
  text "D5" at 9.032,28.56 h1
  text "D1" at 2.581,26.02 h1
  text "D4" at 9.08,26.02 h1
  text "D2" at 2.581,23.48 h1
  text "D3" at 9.032,23.48 h1
  text "GND" at 2.581,20.94 h1
  text "GND" at 10.027,20.94 h1
  text "SW4.3 /  / * / OFF / OFF / OFF / OFF / ON / ON / ON / ON / OFF / OFF / OFF / OFF / ON / ON" at 46.863,15.84 h1
  text "SW4.2 /  / * / OFF / OFF / ON / ON / OFF / OFF / ON / ON / OFF / OFF / ON / ON / OFF / OFF" at 51.943,15.84 h1
  text "SW4.1 /  / * / OFF / ON / OFF / ON / OFF / ON / OFF / ON / OFF / ON / OFF / ON / OFF / ON" at 57.023,15.84 h1
  text "SW4.5 /  / OFF / ON / ON / ON / ON / ON / ON / ON / ON / OFF / OFF / OFF / OFF / OFF / OFF" at 36.703,15.765 h1
  text "SW4.4 /  / OFF /  /  /  /  /  /  /  /  / ON / ON / ON / ON / ON / ON" at 41.783,15.765 h1
  text "ROM Address /  / Boot ROM Disabled / 0xC0000 / 0xC4000 / 0xC8000 / 0xCC000 / 0xD0000 / 0xD4000 / 0xD8000 / 0xDC000 / 0xC0000 / 0xC8000 / 0xD0000 / 0xD8000 / 0xC0000 / 0xD0000" at 77.343,15.741 h1
  text "ROM Size /  /  / 16 KiB / 16 KiB / 16 KiB / 16 KiB / 16 KiB / 16 KiB / 16 KiB / 16 KiB / 32 KiB / 32 KiB / 32 KiB / 32 KiB / 64 KiB / 64 KiB" at 65.913,15.408 h1
Dwgs.User:
  lines w0.15: 94.488,40.005 109.728,40.005